# Altium PCB Controller_Root.PcbDoc
Units mm, origin at the board's own origin, x right, y up, seen from the top; angles counter-clockwise.
Board outline 45.97 x 44.7 mm, 2 copper layers (Top Layer, Bottom Layer); 24 components, 38 nets, 108 pads, 36 vias.
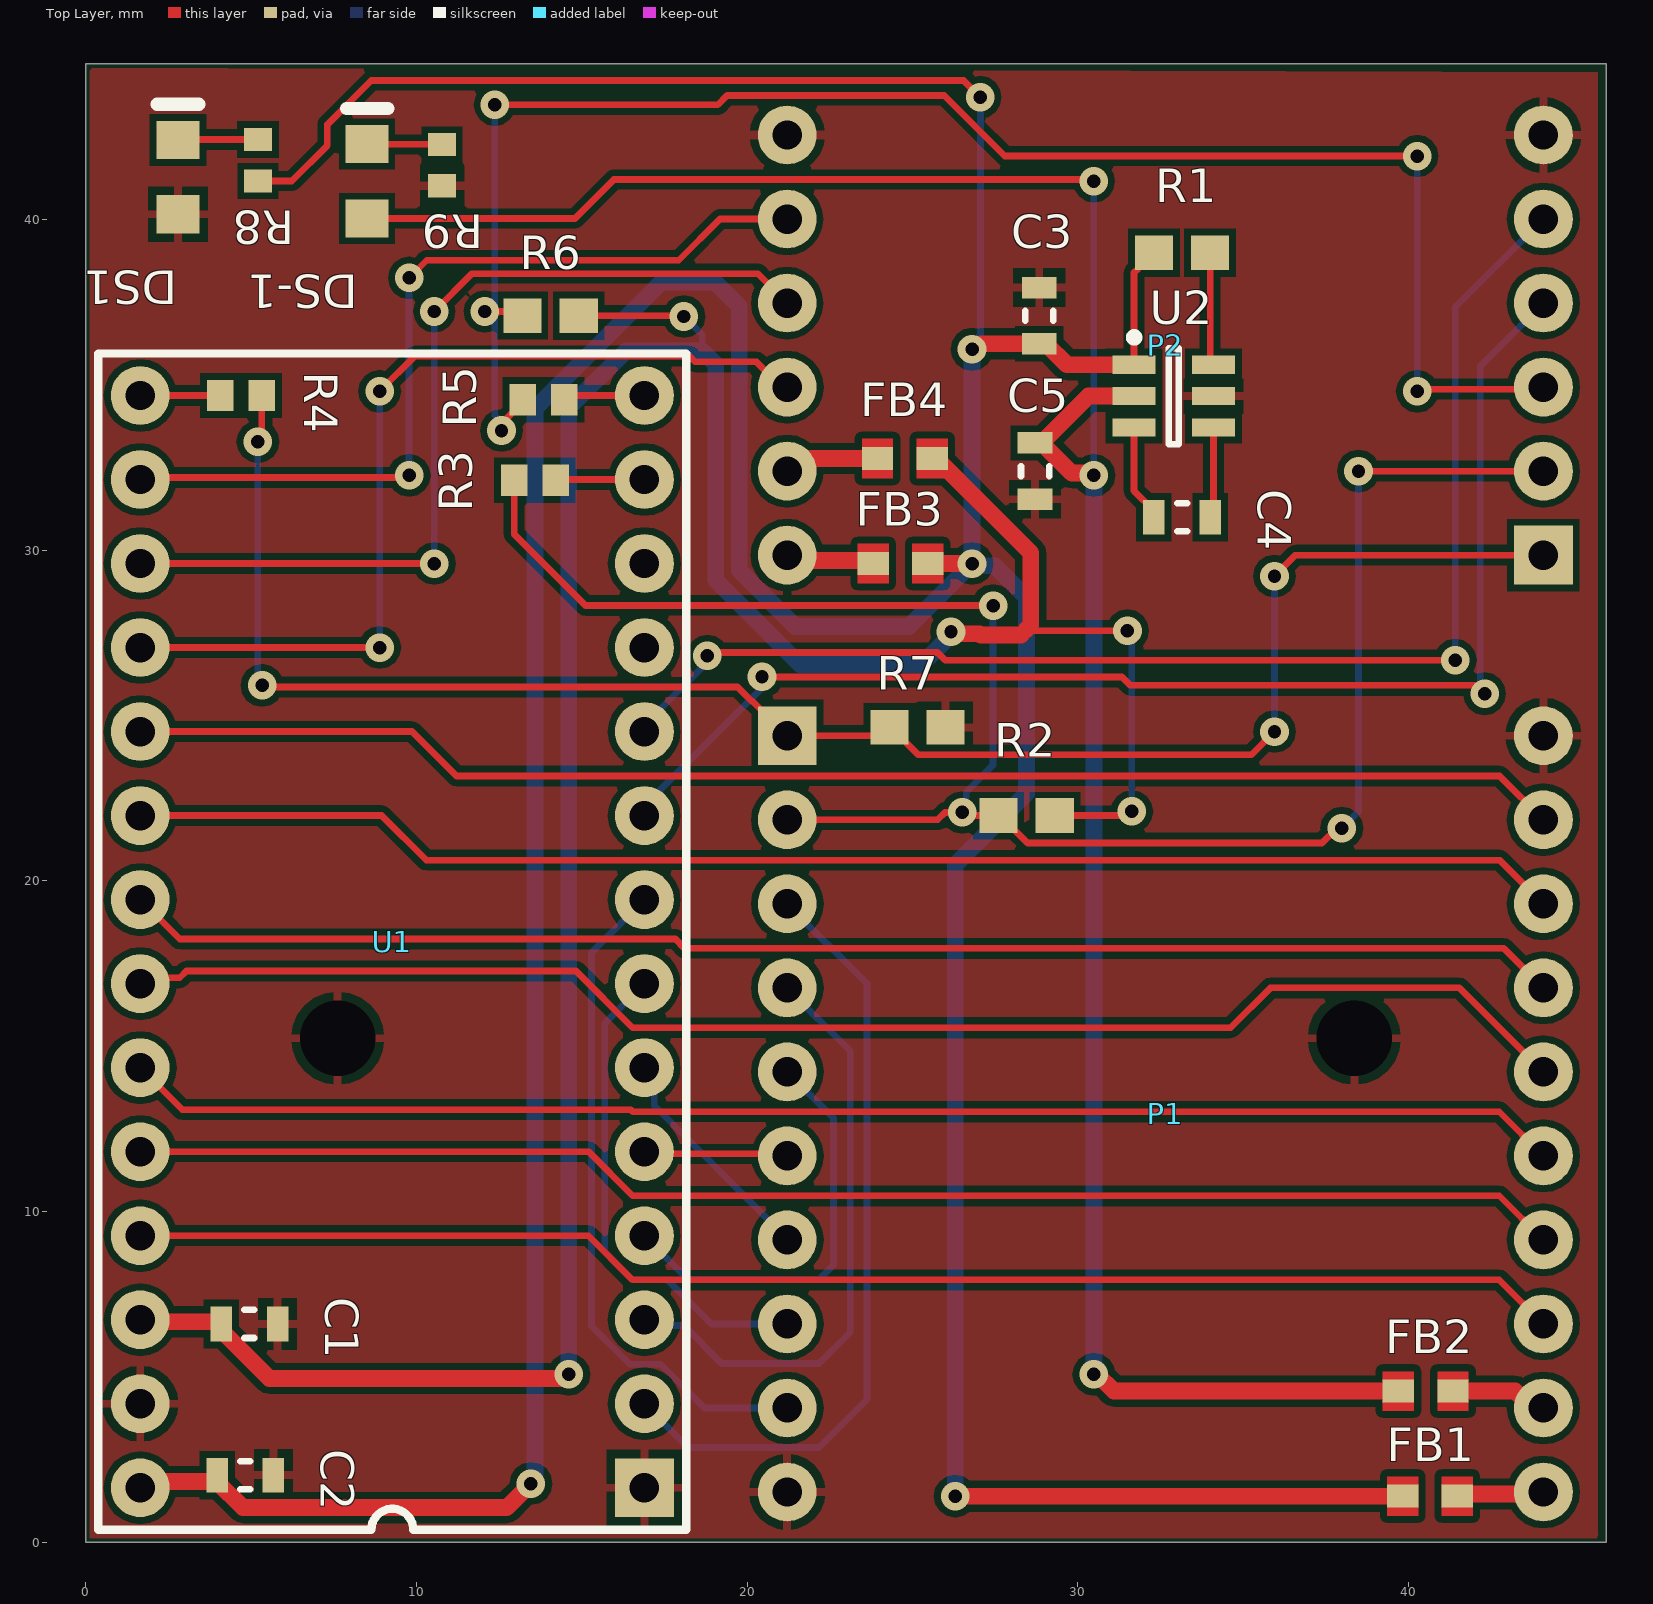
[diagram p0: Top Layer view]
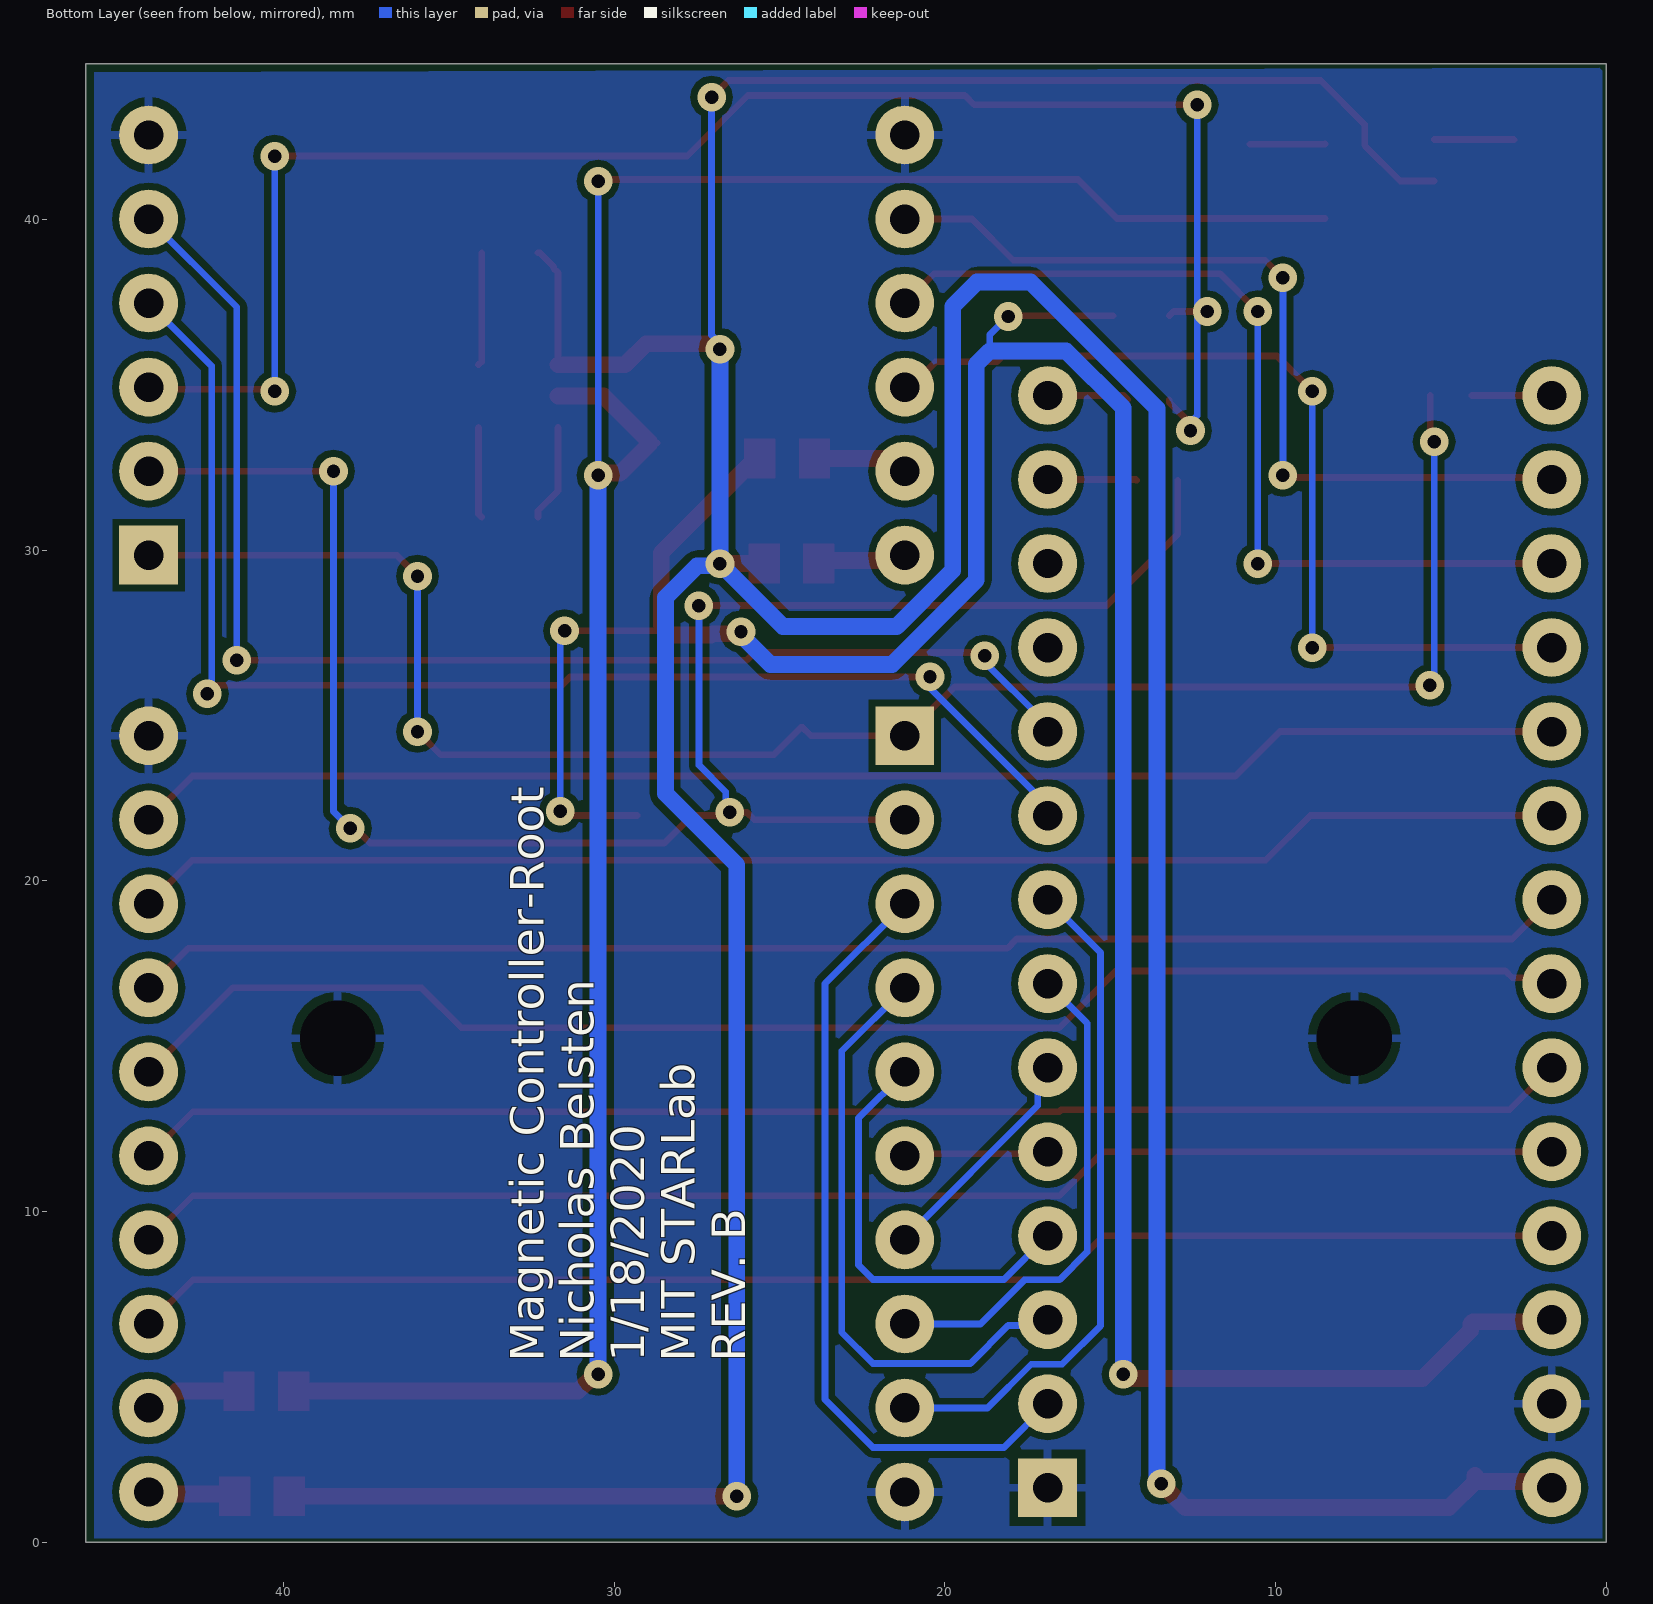
[diagram p1: Bottom Layer view, seen from below]

## Layer stack, top to bottom
Top Solder: solder mask 0.0102, Solder Resist, Dk 3.5
Top Layer: signal copper 0.0356
Dielectric 1: dielectric 0.32, FR-4, Dk 4.8
Bottom Layer: signal copper 0.0356
Bottom Solder: solder mask 0.0102, Solder Resist, Dk 3.5

## Board outline
0,0 45.974,0 45.974,44.704 0,44.704

## Design rules (kind name [scope] priority, off if disabled: settings)
Clearance [All] p1: gap=0.203 ignorepadtopadclearanceinfootprint=FALSE
ComponentClearance [All] p1: gap=0 collisioncheckmode=3 verticalgap=0 showdistances=FALSE
MinimumSolderMaskSliver [All] p1: minsoldermaskwidth=0.102
PolygonConnect [All] p1: connectstyle=Relief reliefconductorwidth=0.254 reliefentries=4 polygonreliefangle="90 Angle" airgapwidth=0.254
RoutingVias [All] p1: holewidth=0.406 width=0.864 viastyle="Through Hole" minholewidth=0.356 minwidth=0.762 maxholewidth=0.762 maxwidth=1.27
SilkToSilkClearance [All] p1: silktosilkclearance=0.127
SilkToSolderMaskClearance [IsPad] p1: minsilkscreentomaskgap=0.051 clearancetoexposedcopper=TRUE
SolderMaskExpansion [All] p1: expansion=0.102 istentingtop=FALSE
Width [All] p1: maxlimit=0.508 minlimit=0.203 preferedwidth=0.254
26 further rules are at their usual default settings.

## Components (designator, comment, footprint, x,y, rotation, side; value= is the part's Value field where it differs from the comment)
C1 "10 uF" CAPC1608X90X20ML10 4.953,6.604 r180 top
C2 "10 uF" CAPC1608X90X20ML10 4.826,2.032 r180 top
C3 "10 uF" CAPC1608X90X20ML10 28.829,37.084 r270 top
C4 "1 uF" CAPC1608X90X20ML10 33.147,30.988 r180 top
C5 "10 uF" CAPC1608X90X20ML10 28.702,32.385 r90 top
DS1 "598-8170-107F" DIAL-0805-2_V 2.794,41.275 r270 top
DS-1 "598-8170-107F" DIAL-0805-2_V 8.509,41.148 r270 top
FB1 "BLM18SG221TN1D" MURA-BLM18SG-B25-CHIP-2_V1 40.64,1.397 r180 top
FB2 "BLM18SG221TN1D" MURA-BLM18SG-B25-CHIP-2_V1 40.513,4.572 r180 top
FB3 "BLM18SG221TN1D" MURA-BLM18SG-B25-CHIP-2_V1 24.638,29.591 r0 top
FB4 "BLM18SG221TN1D" MURA-BLM18SG-B25-CHIP-2_V1 24.765,32.766 r0 top
P1 "dp20" dp20-900 21.209,24.384 r0 top
P2 "dp12" dp12-900 44.069,29.845 r180 top
R1 "10k" RESC1609X55X30ML15T15 33.147,38.989 r0 top
R2 "10k" RESC1609X55X30ML15T15 28.448,21.971 r0 top
R3 "33 Ω" RESC1609X50X30NL10T20 13.581,32.11 r0 top
R4 "33 Ω" RESC1609X50X30NL10T20 4.699,34.671 r0 top
R5 "33 Ω" RESC1609X50X30NL10T20 13.843,34.544 r0 top
R6 "10k" RESC1609X55X30ML15T15 14.058,37.084 r180 top
R7 "10k" RESC1609X55X30ML15T15 25.146,24.638 r180 top
R8 "1 kΩ" RESC1608X55X30LL15T15 5.207,41.783 r270 top
R9 "1 kΩ" RESC1608X55X30LL15T15 10.775,41.637 r270 top
U1 "Teensy4.0" DIP28-600 16.891,1.651 r180 top
U2 "LTC1983ES6-5#TRMPBF" LT-S6-6-TSOT-23_N 32.896,34.652 r0 top

## Footprints (in the part's own frame and the unit in brackets; to place one, negate y for a bottom-side part, rotate by r counter-clockwise, add the part's x,y. Pads: shape width x height; smd on the part's side, far side on the other; paste and mask are expansions set on the pad)
CAPC1608X90X20ML10 [mm] "Chip Capacitor, 2-Leads, Body 1.70x0.90mm, IPC Low Density"
  rect 0.65x1.05 smd: 1(-0.85,0) 2(0.85,0)
  silkscreen extent -0.15,-0.43 0.15,0.43, body extent -0.85,-0.45 0.85,0.45, height 0.9
DIAL-0805-2_V [mm] "LED, 2-Leads, Body 2x1.25mm"
  rect 1.15x1.3 smd: 1(-1.125,0) 2(1.125,0)
  silkscreen extent -2.2,-0.63 -2.2,0.63, body extent -1.03,-0.63 1.03,0.64, height 0.71
DIP28-600 [mil]
  rect 70x70 hole 35: 1(0,0)
  round 70 hole 35: 2(0,-100) 3(0,-200) 4(0,-300) 5(0,-400) 6(0,-500) 7(0,-600) 8(0,-700) 9(0,-800) 10(0,-900) 11(0,-1000) 12(0,-1100) 13(0,-1200) 14(0,-1300) 15(600,-1300) 16(600,-1200) 17(600,-1100) 18(600,-1000) 19(600,-900) 20(600,-800) 21(600,-700) 22(600,-600) 23(600,-500) 24(600,-400) 25(600,-300) 26(600,-200) 27(600,-100) 28(600,0)
  silkscreen extent -50,-1350 650,50
dp12-900 [mil]
  rect 70x70 hole 35: 1(0,0)
  round 70 hole 35: 2(0,-100) 3(0,-200) 4(0,-300) 5(0,-400) 6(0,-500) 7(900,-500) 8(900,-400) 9(900,-300) 10(900,-200) 11(900,-100) 12(900,0)
dp20-900 [mil]
  rect 70x70 hole 35: 1(0,0)
  round 70 hole 35: 2(0,-100) 3(0,-200) 4(0,-300) 5(0,-400) 6(0,-500) 7(0,-600) 8(0,-700) 9(0,-800) 10(0,-900) 11(900,-900) 12(900,-800) 13(900,-700) 14(900,-600) 15(900,-500) 16(900,-400) 17(900,-300) 18(900,-200) 19(900,-100) 20(900,0)
LT-S6-6-TSOT-23_N [mm] "SOT23, 6-Leads, Body 2.9x1.75mm, Pitch 0.95mm, IPC Medium Density"
  rect 1.3x0.55 smd: 1(-1.2,0.95) 2(-1.2,0) 3(-1.2,-0.95) 4(1.2,-0.95) 5(1.2,0) 6(1.2,0.95)
  silkscreen extent -1.32,-1.45 0.15,1.9, body extent -0.87,-1.45 0.87,1.45, height 1
MURA-BLM18SG-B25-CHIP-2_V1 [mm] "Chip Ferrite Bead, 2-Leads, Body 1.6x0.8mm, Height 0.65mm, Flow, 18um Land Pad Thickness, 1.7 to 2.5A Rated Current"
  rect 0.95x0.7 smd mask+0: 1(-0.825,0) 2(0.825,0)
  Top Layer region: -1.3,-0.6 -0.35,-0.6 -0.35,0.6 -1.3,0.6
  Top Layer region: 0.35,-0.6 1.3,-0.6 1.3,0.6 0.35,0.6
  body extent -0.8,-0.4 0.8,0.4, height 0.65
RESC1608X55X30LL15T15 [mm] "Chip Resistor, 2-Leads, Body 1.60x0.80mm, IPC High Density"
  rect 0.7x0.85 smd: 1(-0.625,0) 2(0.625,0)
  body extent -0.87,-0.48 0.87,0.48, height 0.55
RESC1609X50X30NL10T20 [mm] "Chip Resistor, 2-Leads, Body 1.55x0.85mm, IPC Medium Density"
  rect 0.8x0.95 smd: 1(-0.625,0) 2(0.625,0)
  body extent -0.82,-0.48 0.82,0.48, height 0.5
RESC1609X55X30ML15T15 [mm] "Chip Resistor, 2-Leads, Body 1.75x0.95mm, IPC Low Density"
  rect 1.15x1.05 smd: 1(-0.85,0) 2(0.85,0)
  body extent -0.87,-0.48 0.87,0.48, height 0.55

## Part data
C1 C2 C3 C5: library part CMP-2000-04979-1, "Chip Capacitor, 10 uF, +/- 10%, 10 V, -55 to 85 degC, 0603 (1608 Metric), RoHS, Tape and Reel", Capacitance=10µF, Manufacturer=TDK, Operating Temperature=-55degC~85degC, Package / Case=0603(1608Metric), Package Description="2-Pin Surface Mount Device, Body 1.6 x 0.8 mm", Package Reference=603, PCN Part Number=MLCCPartNumberChange30/Nov/2012, Ratings=-, Standard Package=1, Temperature Coefficient=X5R, Tolerance=±10%, Voltage - Rated=10V, Applications=GeneralPurpose, Category=Capacitors, Datasheet URL=http://download.siliconexpert.com/pdfs/2015/4/21/15/54/45/779/tdk_/manual/37024850441143360mlcc_commercial_general_en.pdf, Datasheet Version=Mar-15, Design Resources=20WNon-IsolatedBuckLEDDriverUsingPLLNK460KG, Family=CeramicCapacitors, Features=-, Height - Seated (Max)=-, Kits=445-9003-KIT-ND-KITCAPCERHICAPMLCCSMD, Lead Spacing=-, Lead Style=-, Manufacturer URL=http://www.tdk.com/, Mounting Type=SurfaceMount,MLCC, Online Catalog=CSeries,GeneralPurpose, Other Names=445-7486-1, Packaging=CutTape(CT), Product Training Modules=CSeriesGeneralApplicationsSEAT,CCV,andTVCLDesignToolsGuidetoReplacinganElectrolyticCapacitorwithanMLCC, RoHS Information=RoHSCertificate-MLCC, Series=C, Size / Dimension="0.063\"Lx0.031\"W(1.60mmx0.80mm)", Thickness (Max)="0.035\"(0.90mm)"
C4: library part CMP-2000-06025-1, "Chip Capacitor, 1 uF, +/- 10%, 50 V, -55 to 85 degC, 0603 (1608 Metric), RoHS, Tape and Reel", Capacitance=1µF, Manufacturer=TDK, Operating Temperature=-55°C~85°C, Package / Case=0603(1608Metric), Package Description="2-Pin Surface Mount Device, Body 1.6 x 0.8 mm", Package Reference=0603, PCN Part Number=MLCCPartNumberChange30/Nov/2012, Ratings=-, Standard Package=1, Temperature Coefficient=X5R, Tolerance=±10%, Voltage - Rated=50V, Applications=GeneralPurpose, Category=Capacitors, Datasheet URL=https://product.tdk.com/info/en/catalog/datasheets/mlcc_commercial_general_en.pdf, Datasheet Version=08/2016, Design Resources=20WNon-IsolatedBuckLEDDriverUsingPLLNK460KG, Family=CeramicCapacitors, Features=-, Height - Seated (Max)=-, Lead Spacing=-, Lead Style=-, Manufacturer URL=http://www.tdk.com/, Mounting Technology=SurfaceMount, Mounting Type=SurfaceMount,MLCC, Online Catalog=CSeries,GeneralPurpose, Other Names=445-7468-6, Packaging=Digi-Reel®, Product Training Modules=CSeriesGeneralApplicationsSEAT,CCV,andTVCLDesignToolsGuidetoReplacinganElectrolyticCapacitorwithanMLCC, RoHS Information=RoHSCertificate-MLCC, Series=C, Size / Dimension="0.063\"Lx0.031\"W(1.60mmx0.80mm)", Thickness (Max)="0.035\"(0.90mm)"
DS1 DS-1: library part CMP-2000-05655-1, "Single Color, 2 V, -30 to 85 degC, 2-Pin SMD (0805), RoHS, Tape and Reel", Emitting Color=YellowGreen, Forward Current=25mA, Forward Voltage=2.4V, Manufacturer=Dialight, Operating Temp Range=-30Cto85C, Operating Temperature Classification=Commercial, Package Description="2-Pin Surface Mount Device, Body 2 x 1.25 mm", Package Reference=0805, Package Type=SMD, Power Dissipation=60W, Reverse Voltage=5V, Test Current (It)=20mA, Chip Material=GaP, Datasheet URL=https://datasheet.ciiva.com/22748/1484480-22748121.pdf, Datasheet Version=10/2008, DELETED=Compliant, Dominant Wave Length=570nm, High Brightness=No, Lens Dimensions=1.4x1.25x0.4mm, Lum Intensity=20mcd, Luminous Intensity=20mcd, Main Category=ChipLED, Manufacturer URL=http://www.dialight.com/, Mounting=SurfaceMount, Mounting Technology=SurfaceMount, Number of  Elements=1, Packaging=TapeandReel, Pin Count=2, Product Depth (mm)=1.25mm, Product Height (mm)=0.7mm, Product Length (mm)=2mm, Rad Hardened=No, Shape Type=Rectangular, Type=Uni-Color, Viewing Angle=140deg
FB1 FB2 FB3 FB4: library part CMP-0686-00596-2, "Chip Ferrite Bead for Power Lines (Low DC Resistance Type), 220 Ohm, 2500 mA, -55 to 125 degC, 1.6 x 0.8 x 0.65 mm SMD, Tape and Reel", DC Resistance="0.040 Ohm Max.", Manufacturer=Murata, Operating Temperature Range="-55 to 125 degC", Rated Current="2500 mA", ComponentLink1Description="Manufacturer URL", ComponentLink1URL=http://www.murata.com/, ComponentLink2Description=Datasheet, ComponentLink2URL=http://www.murata.com/products/catalog/pdf/c31e.pdf, ComponentLink3Description="Package Specification", ComponentLink3URL=http://www.murata.com/products/catalog/pdf/c31e.pdf, DatasheetVersion=08/2013, Impedance (at 100 MHz)="220 Ohm +/- 25%", Mounting Technology="Surface Mount", PackageDescription="2-Pin Chip, Body 1.6 x 0.8 mm", PackageReference=BLM18_H650-2, Packing="Tape and Reel", PartNumber=BLM18SG221TN1D
R1 R2 R6 R7: library part CMP-2000-07452-1, "Chip Resistor, 10 KOhm, +/- 1%, 0.1 W, -55 to 155 degC, 0603 (1608 Metric), RoHS, Tape and Reel", Case Code (Imperial)=0603, Case Code (Metric)=1608, Manufacturer=Panasonic, Max Operating Temperature=155degC, Max Power Dissipation=100mW, Min Operating Temperature=-55degC, Package Description="2-Pin Surface Mount Device, Body 1.6 x 0.85 mm", Package Quantity=1, Package Reference=603, Resistance=10KOhm, Temperature Coefficient=100ppm\/degreesC, Tolerance=1%, Voltage Rating=75V, Case\/Package=0603, Composition=ThickFilm, Contact Plating=Tin, Datasheet URL=https://industrial.panasonic.com/cdbs/www-data/pdf/RDA0000/AOA0000C304.pdf, Datasheet Version=02/2017, Depth=0.8mm, Height=0.45mm, Lead Free=LeadFree, Length=1.6mm, Manufacturer URL=http://www.panasonic.com/, Military Standard=Not, Mount=SurfaceMount, Mounting Technology=SurfaceMount, Number of Pins=2, Number of Terminations=2, Packaging=TapeandReel, Power Rating=100mW, Radiation Hardening=No, REACH SVHC=NoSVHC, RoHSCompliant=true, Termination=SMD/SMT, Voltage Rating (DC)=75V, Width=0.031inch
R3 R4 R5: library part CMP-2000-03250-1, Manufacturer="Vishay Dale", Part Number=CRCW060333R0FKEA, Resistance="33 Ω"
R8 R9: library part CMP-2000-00180-1, Manufacturer=Panasonic, Part Number=ERJ-3EKF1001V, Resistance="1 kΩ"
U2: library part CMP-0475-00352-1, "100 mA Regulated Charge-Pump Inverter, 5 to 5.5 V Vin, -5 V Vout, 6-pin SOT23 (S6-6), -40 to 85 degC, Pb-Free, Mini Tape and Reel", Frequency(kHz)=900, Manufacturer="Linear Technology", Code_JEDEC=MO-193, ComponentLink1Description="Manufacturer URL", ComponentLink1URL=http://www.linear.com/, ComponentLink2Description=Datasheet, ComponentLink2URL=http://cds.linear.com/docs/en/datasheet/1983fa.pdf, ComponentLink3Description="Package Specification", ComponentLink3URL=http://cds.linear.com/docs/en/packaging/SOT_6_05-08-1636.pdf, DatasheetVersion="Rev. A", Ishutdown(uA)=0.1, Isupply(mA)=0.025, Max Iout(mA)=100, Mounting Technology="Surface Mount", PackageDescription="6-Pin Plastic TSOT-23, Body 2.9 x 1.63 mm, Pitch 0.95 mm", PackageReference=S6-6, PackageVersion=Jun-10, Packing="Mini Tape and Reel", PartNumber=LTC1983ES6-5#TRMPBF, RoHS=TRUE, Vin Max(V)=5.5, Vin Min(V)=5, Voutput="-5 V"

## Free pads (board coordinates)
  round 0 hole 2.286: 1(38.354,15.24) 21(7.62,15.24)

## Via types
v1: diameter 0.864, hole 0.406, Top Layer to Bottom Layer, 36 vias

## Nets (pads, with @x,y where several pads share a name; then routed paths per layer and width w, separated by ;. In a path a pad name is that pad's centre, name@x,y a point inside that pad or via, vN(x,y) a via of type N, cw(c..) or ccw(c..) an arc to the next point about the centre after c; other vN are vias at no path point)
3V3: C1.2 FB4.2 R2.2 R6.1 U1.26 | length 87.9
  Top Layer w0.203: R6.1 18.059,37.084 v1(18.085,37.059) ; 28.277,27.432 28.404,27.559 v1(31.496,27.559) ; R2.2 31.496,21.971 v1(31.623,22.098)
  Top Layer w0.508: U1.26 1.714,6.667 4.04,6.667 C1.2 4.103,6.404 5.554,4.953 14.478,4.953 v1(14.605,5.08) ; FB4.2 25.715,32.766 28.575,29.906 28.575,27.73 28.404,27.559 ; v1(26.162,27.534) 26.23,27.466 27.03,27.466 27.064,27.432 28.277,27.432
  Bottom Layer w0.203: v1(18.085,37.059) 18.644,36.5 18.644,36.017 ; v1(31.496,27.559) 31.504,27.559 31.623,27.44 v1(31.623,22.098)
  Bottom Layer w0.508: v1(14.605,5.08) 14.605,34.29 16.332,36.017 18.644,36.017 19.05,35.611 19.05,29.083 21.59,26.543 25.273,26.543 26.162,27.432 v1(26.162,27.534)
5V: C2.2 C3.2 FB1.2 FB3.2 R1.1 R8.2 U1.28 U2.1 | length 161.6
  Top Layer w0.203: R8.2 6.233,41.158 7.308,42.233 7.308,42.868 8.636,44.196 26.543,44.196 v1(27.051,43.688) ; U2.1 31.696,38.388 31.824,38.516 31.824,38.566 32.247,38.989 R1.1
  Top Layer w0.508: U1.28 1.841,1.841 3.943,1.841 C2.2@3.976,1.874 ; C2.2 C2.2@3.976,1.874 ; v1(13.462,1.778) 12.734,1.05 4.758,1.05 3.976,1.832 C2.2@3.976,1.874 ; FB3.2 v1(26.797,29.591) ; v1(26.289,1.397) FB1.2 ; v1(26.797,36.068) 26.893,36.068 27.059,36.234 C3.2 29.029,36.234 29.661,35.602 U2.1
  Bottom Layer w0.203: v1(26.797,36.068) 26.797,36.247 27.051,36.501 v1(27.051,43.688)
  Bottom Layer w0.508: v1(13.462,1.778) 13.588,1.904 13.588,34.279 17.409,38.1 19.025,38.1 19.761,37.363 19.761,29.378 21.453,27.686 24.892,27.686 v1(26.797,29.591) ; v1(26.289,1.397) 26.289,20.475 28.448,22.634 28.448,28.562 27.487,29.523 26.865,29.523 v1(26.797,29.591) ; v1(26.797,36.068) v1(26.797,29.591)
-5V: C5.2 DS-1.2 FB2.2 U2.2 | length 73.5
  Top Layer w0.203: DS-1.2 14.793,40.023 15.968,41.199 30.429,41.199 v1(30.48,41.148) ; C5.2 C5.2@28.902,33.235
  Top Layer w0.508: v1(30.48,5.08) 30.576,5.08 31.084,4.572 FB2.2 ; v1(30.48,32.258) 30.412,32.326 29.811,32.326 28.902,33.235 30.319,34.652 U2.2
  Bottom Layer w0.203: v1(30.48,32.258) v1(30.48,41.148)
  Bottom Layer w0.508: v1(30.48,5.08) v1(30.48,32.258)
A_0: P1.13 U1.25 | length 43.5
  Top Layer w0.203: U1.25 15.203,9.271 16.536,7.938 42.735,7.938 P1.13
A_1: P1.14 U1.24 | length 43.5
  Top Layer w0.203: U1.24 15.203,11.811 16.536,10.477 42.735,10.477 P1.14
A_2: P1.15 U1.23 | length 43.5
  Top Layer w0.203: U1.23 2.921,13.081 16.473,13.081 16.536,13.018 42.735,13.018 P1.15
A_3: P1.16 U1.22 | length 44.8
  Top Layer w0.203: U1.22 1.829,17.069 2.845,17.069 3.048,17.272 14.822,17.272 16.536,15.557 34.608,15.557 35.814,16.764 41.529,16.764 P1.16
A_4: P1.17 U1.21 | length 43.5
  Top Layer w0.203: U1.21 2.845,18.237 17.831,18.237 18.11,17.958 42.875,17.958 P1.17
A_5: P1.18 U1.20 | length 43.5
  Top Layer w0.203: U1.20 8.951,21.971 10.297,20.625 42.748,20.625 P1.18
A_6: P1.19 U1.19 | length 43.5
  Top Layer w0.203: U1.19 9.865,24.511 11.211,23.165 42.748,23.165 P1.19
dCS_0: P1.3 U1.2 | length 23.9
  Bottom Layer w0.203: U1.2 18.212,2.87 22.174,2.87 23.622,4.318 23.622,16.891 P1.3
dCS_1: P1.4 U1.3 | length 18.4
  Bottom Layer w0.203: U1.3 17.069,6.553 18.085,6.553 19.228,5.41 22.174,5.41 23.114,6.35 23.114,14.859 P1.4
dCS_2: P1.5 U1.4 | length 12.9
  Bottom Layer w0.203: U1.4 18.212,7.95 22.174,7.95 22.606,8.382 22.606,12.827 P1.5
dCS_3: P1.6 U1.5 | length 4.6
  Top Layer w0.203: U1.5 16.954,11.747 21.145,11.747 P1.6
  Bottom Layer w0.203: U1.5 U1.5@16.954,11.747 ; P1.6@21.145,11.747 P1.6
dCS_4: P1.7 U1.6 | length 7
  Bottom Layer w0.203: U1.6 17.192,14.05 17.192,13.198 21.209,9.181 P1.7
dCS_5: P1.8 U1.7 | length 15
  Bottom Layer w0.203: U1.7 15.697,15.697 15.697,8.777 16.536,7.938 17.589,7.938 18.923,6.604 P1.8
dCS_6: P1.9 U1.8 | length 20.5
  Bottom Layer w0.203: U1.8 15.291,17.831 15.291,6.545 16.451,5.385 17.385,5.385 18.706,4.064 P1.9
GND: C1.1 C2.1 C3.1 C5.1 DS1.2 P1.10 P1.20 P2.6 P2.7 pad.1 pad.21 R7.1 R9.2 U1.1 U1.27 U2.5
NetC4_1: C4.1 U2.4 | length 2.8
  Top Layer w0.203: C4.1 34.096,31.087 U2.4
NetC4_2: C4.2 U2.3 | length 3
  Top Layer w0.203: U2.3 31.696,31.789 32.297,31.188 C4.2
NetDS1_1: DS1.1 R8.1 | length 2.4
  Top Layer w0.203: DS1.1 2.802,42.408 R8.1
NetDS-1_1: DS-1.1 R9.1 | length 2.3
  Top Layer w0.203: DS-1.1 8.52,42.262 R9.1
NetFB1_1: FB1.1 P1.11 | length 2.7
  Top Layer w0.508: FB1.1 41.528,1.46 44.005,1.46 P1.11
NetFB2_1: FB2.1 P1.12 | length 2.9
  Top Layer w0.508: FB2.1 43.217,4.572 43.725,4.064 P1.12
NetFB3_1: FB3.1 P2.12 | length 2.7
  Top Layer w0.508: P2.12 21.367,29.687 23.717,29.687 FB3.1
NetFB4_1: FB4.1 P2.11 | length 3.4
  Top Layer w0.203: P2.11 P2.11@21.342,32.518 ; FB4.1@23.692,32.518 FB4.1
  Top Layer w0.508: P2.11 21.553,32.385 21.934,32.766 FB4.1
NetR1_2: R1.2 U2.6 | length 3.4
  Top Layer w0.203: R1.2 33.997,35.702 U2.6
NetR3_2: R3.2 U1.13 | length 2.7
  Top Layer w0.203: R3.2 14.227,32.131 U1.13
NetR4_1: R4.1 U1.15 | length 2.4
  Top Layer w0.203: U1.15 R4.1
NetR5_2: R5.2 U1.14 | length 2.5
  Top Layer w0.203: R5.2 14.595,34.671 U1.14
sCS_0: P2.4 U1.9 | length 39.9
  Top Layer w0.203: v1(20.447,26.162) 31.331,26.162 31.585,25.908 v1@42.164,25.908
  Bottom Layer w0.203: U1.9 16.891,22.275 20.447,25.831 v1(20.447,26.162) ; v1@42.164,25.908 42.164,35.56 P2.4 P2.4@43.987,37.465
  other v1: 42.291,25.654
sCS_1: P2.5 U1.10 | length 40.4
  Top Layer w0.203: v1(18.796,26.797) 18.898,26.899 25.755,26.899 25.984,26.67 v1(41.402,26.67)
  Bottom Layer w0.203: U1.10 16.891,24.892 17.07,24.892 18.796,26.618 v1(18.796,26.797) ; v1(41.402,26.67) 41.402,37.338 P2.5
sCS_2: P2.10 U1.18 | length 28.1
  Top Layer w0.203: U1.18 v1(8.89,27.051) ; v1(8.89,34.798) 9.957,35.865 18.251,35.865 18.429,35.687 20.283,35.687 21.045,34.925 P2.10
  Bottom Layer w0.203: v1(8.89,27.051) v1(8.89,34.798)
sCS_3: P2.9 U1.17 | length 28
  Top Layer w0.203: U1.17 v1(10.541,29.591) ; v1(10.541,37.211) 11.684,38.354 20.32,38.354 P2.9
  Bottom Layer w0.203: v1(10.541,29.591) v1(10.541,37.211)
sCS_4: P2.8 U1.16 | length 26.3
  Top Layer w0.203: U1.16 1.714,32.194 9.716,32.194 v1(9.779,32.258) ; v1(9.779,38.227) 10.312,38.76 17.932,38.76 19.177,40.005 P2.8
  Bottom Layer w0.203: v1(9.779,32.258) v1(9.779,38.227)
SPI_MISO: P2.3 R5.1 R6.2 | length 51.9
  Top Layer w0.203: v1(12.065,37.211) 13.081,37.211 R6.2 ; v1(12.37,43.459) 19.114,43.459 19.393,43.739 25.958,43.739 27.787,41.91 v1(40.259,41.91) ; v1@12.699,33.739 12.699,33.95 13.218,34.469 R5.1 ; v1(40.259,34.798) 40.322,34.861 43.878,34.861 43.942,34.798 P2.3
  Bottom Layer w0.203: v1(12.37,43.459) 12.37,34.068 v1@12.699,33.739 ; v1(40.259,34.798) v1(40.259,41.91)
  other v1: 12.572,33.612
SPI_MOSI: P1.2 P2.2 R2.1 R3.1 | length 57.6
  Top Layer w0.203: R3.1 12.956,30.478 15.113,28.321 v1(27.432,28.321) ; P1.2 25.755,21.844 25.978,22.066 26.623,22.066 26.718,21.971 R2.1 27.648,21.971 28.478,21.141 37.38,21.141 37.829,21.59 v1(37.973,21.59) ; v1(38.481,32.385) P2.2
  Bottom Layer w0.203: v1@26.623,22.066 26.623,22.686 27.432,23.495 v1(27.432,28.321) ; v1(37.973,21.59) 38.481,22.098 v1(38.481,32.385)
  other v1: 26.496,22.066
SPI_SCLK: P1.1 P2.1 R4.2 R7.2 | length 53.9
  Top Layer w0.203: v1(5.207,33.274) 5.324,33.391 R4.2 ; v1(5.334,25.908) 5.385,25.857 19.71,25.857 20.142,25.425 20.168,25.425 P1.1 24.042,24.384 R7.2 24.346,24.638 25.176,23.808 35.238,23.808 v1(35.941,24.511) ; v1(35.941,29.21) 36.576,29.845 P2.1
  Bottom Layer w0.203: v1(5.207,33.274) 5.207,26.035 v1(5.334,25.908) ; v1(35.941,24.511) v1(35.941,29.21)
pads on no net: U1.11 U1.12

## Polygon pours and split planes (outlines as drawn)
GND on Top Layer "top_solder_thermal" (solid, pour order 0): 0.127,44.577 0.127,0.127 45.847,0.127 45.72,0.254 45.72,44.45
GND on Bottom Layer "top_solder_thermal" (solid, pour order 1): 0.127,44.577 0.127,0.127 45.72,0.127 45.72,0.254 45.72,44.45

## Silkscreen, mask and mechanical layers (free items; w line width, h text height)
Bottom Overlay:
  text "Magnetic Controller-Root / Nicholas Belsten / 1/18/2020 / MIT STARLab / REV. B" at 26.035,5.461 h1.02 r270
Mechanical 2 (Mech4):
  lines w0.254: 0,0 0,0.127 0,44.704 45.974,44.704 45.974,0 0,0

## Text inside footprints (layer, text, board x,y; h text height)
FB1: Mechanical 6 "Land Pattern Adapted for Flow Soldering and 18um Land Pad Thickness" at 42.29,0.597 h0.05 r180
FB2: Mechanical 6 "Land Pattern Adapted for Flow Soldering and 18um Land Pad Thickness" at 42.163,3.772 h0.05 r180
FB3: Mechanical 6 "Land Pattern Adapted for Flow Soldering and 18um Land Pad Thickness" at 22.988,30.391 h0.05
FB4: Mechanical 6 "Land Pattern Adapted for Flow Soldering and 18um Land Pad Thickness" at 23.115,33.566 h0.05